# EAGLE board avoccado-nora-panel-teardropped (EAGLE 7.2.0), part 1 of 2
Avoccado-avr-yolandi Yolandi is the minified version of Avoccado-avr with less pins broken out and a footprint of less than one square inch for the PCB without peripherals.
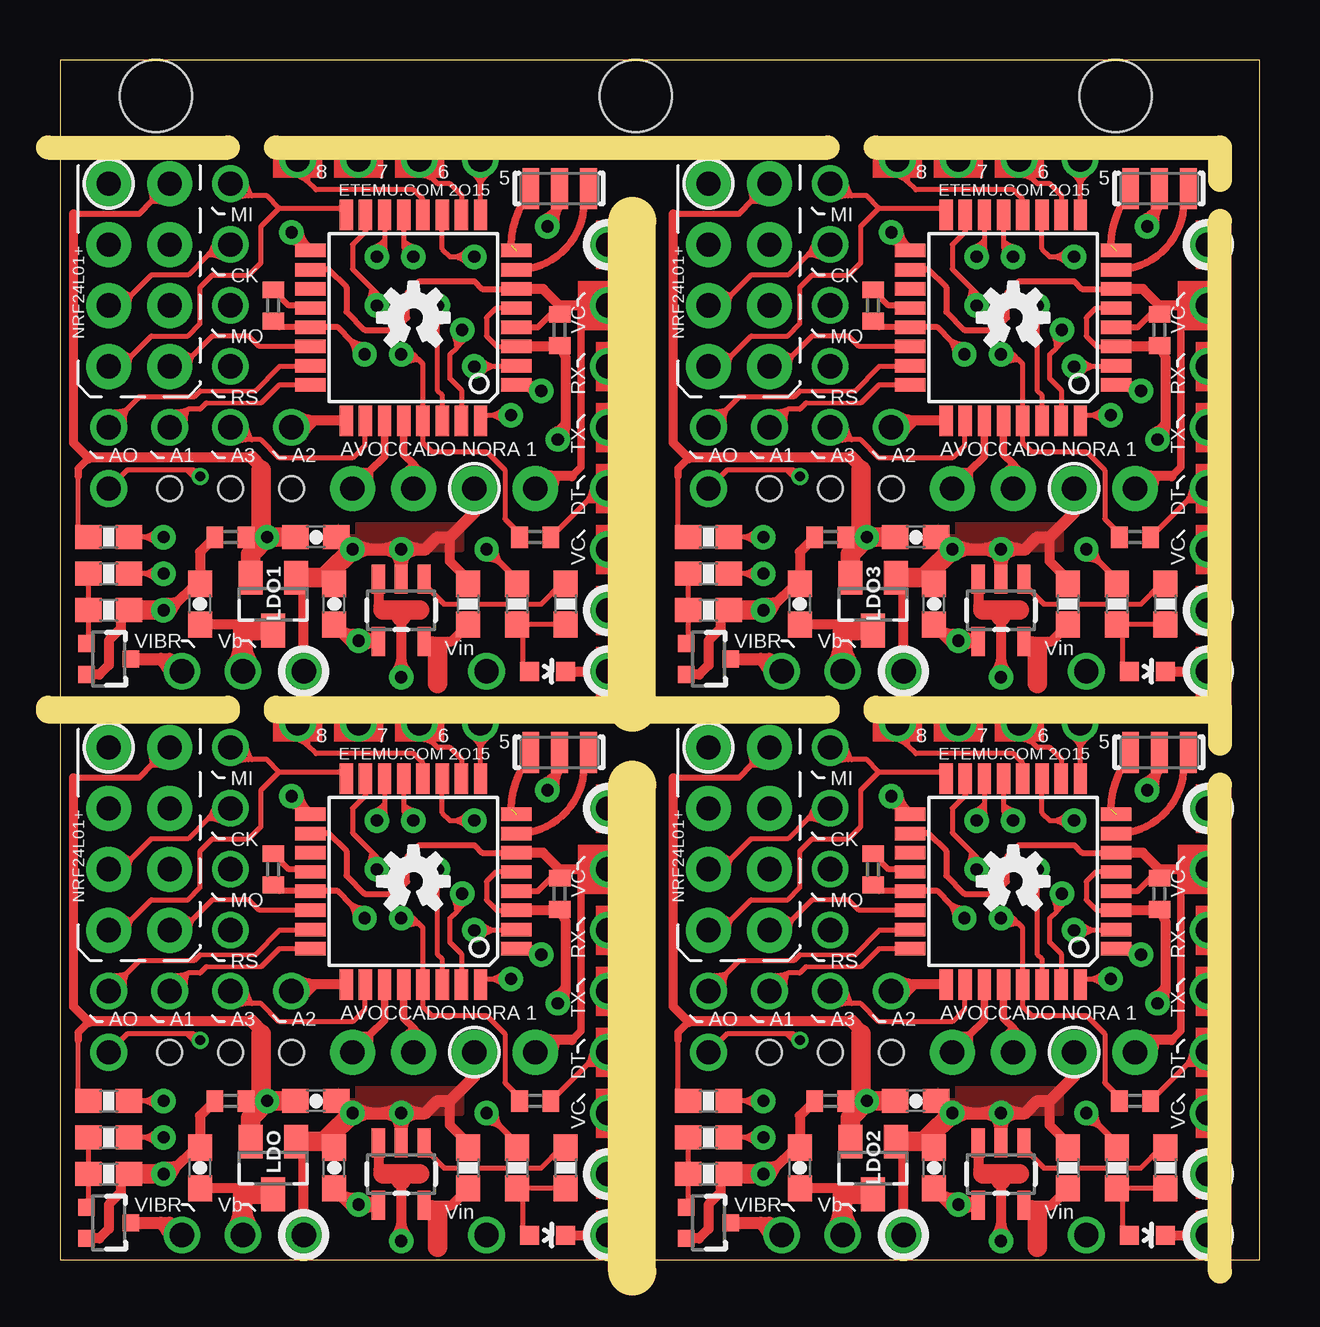
[diagram p0: board, top side]
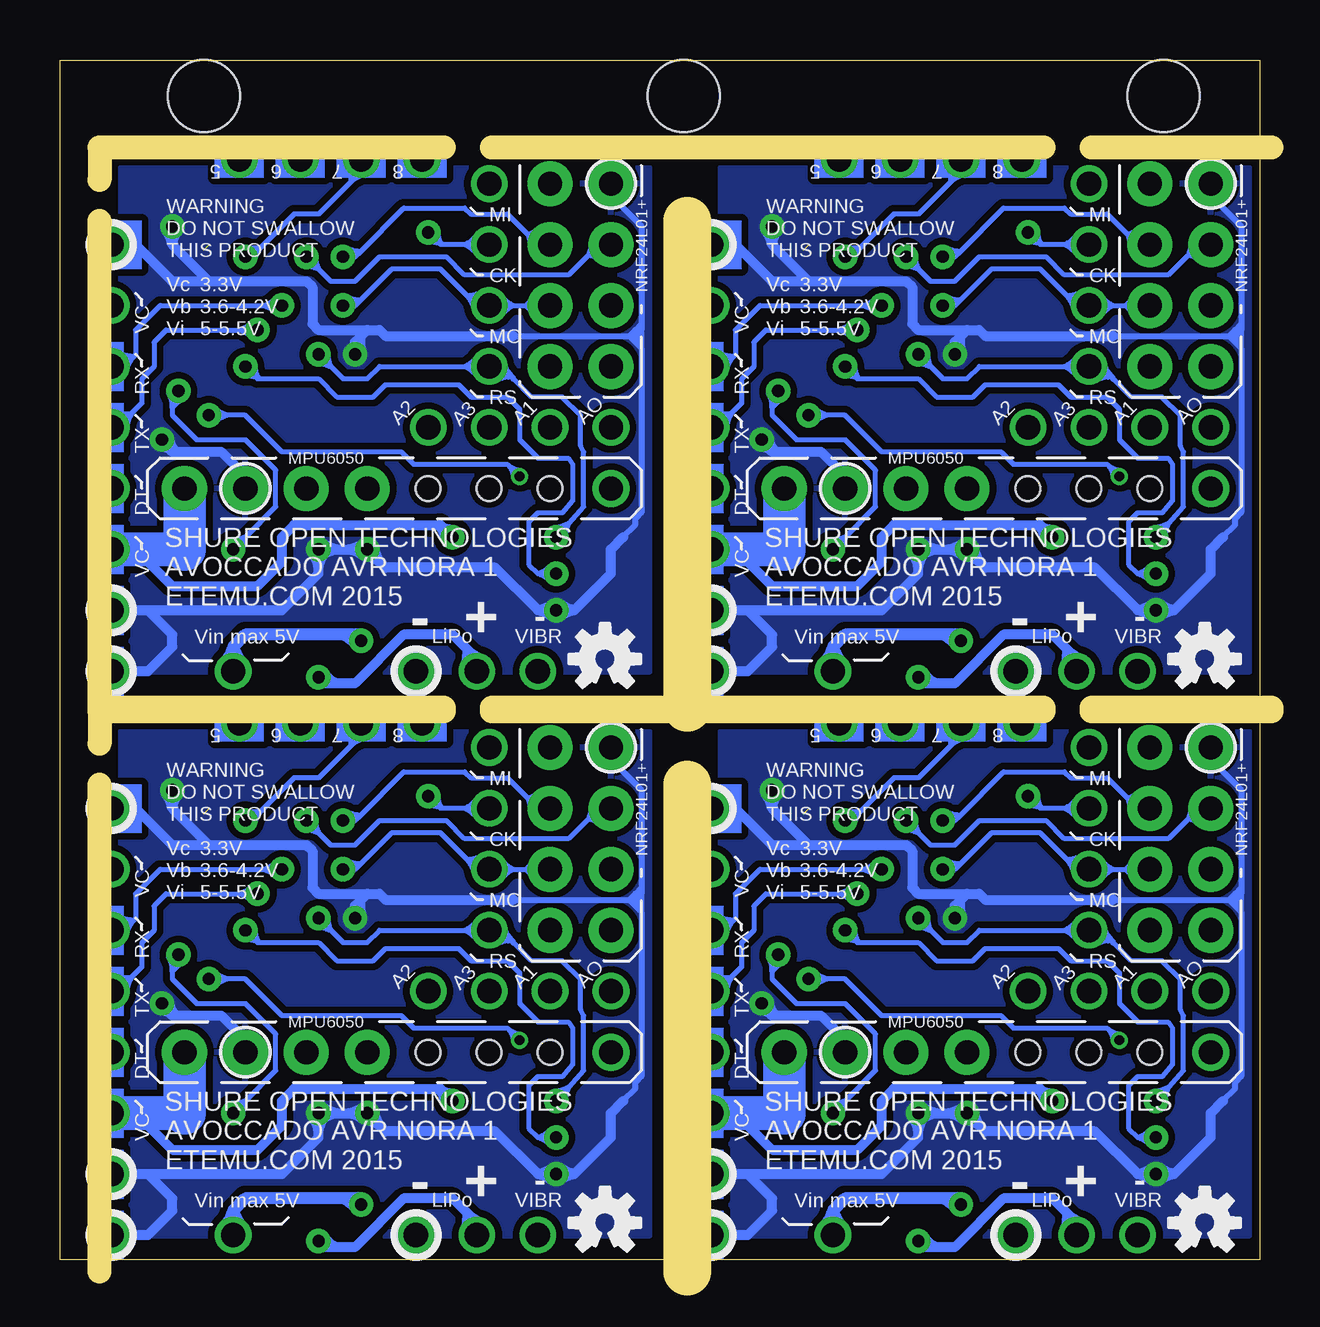
[diagram p1: board, bottom side, seen from below]

Size 50 x 50 mm. Coordinates in mm from the lower left corner, seen from the top.
Outline: 0,0 50,0 50,50 0,50 0,0
Copper layers (1*16): Top 0.035mm / dielectric 1.5mm / Bottom 0.035mm
Design rules "dirt_cheap_dirty_boards.v1 *": minimum track width 5mil, minimum drill 12mil, track to track 5mil, track to pad 5mil, pad to pad 5mil, via to via 5mil, smd to smd 0mil, copper to edge 10mil, drill to drill 10mil, minimum pad ring 10mil, minimum via ring 6mil, stop-mask expansion 0mil, vias tented up to drill 25mil, thermal gap 10mil
Net classes: 1 vcc: width 0.254 mm; 3 usbvcc: width 0.203 mm, drill 0.61 mm, clearance 0.152 mm
Holes 1.02 mm at 4.57,8.64 7.11,8.64 9.65,8.64 4.57,32.14 7.11,32.14 9.65,32.14 29.57,8.64 32.11,8.64 34.65,8.64 29.57,32.14 32.11,32.14 34.65,32.14
Holes 3 mm at 4,48.5 24,48.5 44,48.5
Milling: 16 lines

## Footprints (pad centres in the part's own frame; a part is rotated, then mirrored left to right if it is on the bottom)
TQFP32-08 = smd 1.27 x 0.559: 1 -4.293,2.8; 2 -4.293,2; 3 -4.293,1.2; 4 -4.293,0.4; 5 -4.293,-0.4; 6 -4.293,-1.2; 7 -4.293,-2; 8 -4.293,-2.8; 17 4.293,-2.8; 18 4.293,-2; 19 4.293,-1.2; 20 4.293,-0.4; 21 4.293,0.4; 22 4.293,1.2; 23 4.293,2; 24 4.293,2.8 | smd 0.559 x 1.27: 9 -2.8,-4.293; 10 -2,-4.293; 11 -1.2,-4.293; 12 -0.4,-4.293; 13 0.4,-4.293; 14 1.2,-4.293; 15 2,-4.293; 16 2.8,-4.293; 25 2.8,4.293; 26 2,4.293; 27 1.2,4.293; 28 0.4,4.293; 29 -0.4,4.293; 30 -1.2,4.293; 31 -2,4.293; 32 -2.8,4.293
C0402 = smd 0.7 x 0.9: 1 -0.65,0; 2 0.65,0
0603-CAP = smd 1.1 x 1: 1 -0.85,0; 2 0.85,0
LED-0603 = smd 0.8 x 0.8: A 0,-0.75; C 0,0.75
1X01NS-KIT = drill 1.016 pad 1.524: 1 0,0
1X02_NO_SILK = drill 1.016 pad 1.88: 1 0,0; 2 2.54,0
SOT23 = smd 1 x 1.4: 1 -0.95,-1.1; 2 0.95,-1.1; 3 0,1.1
RESONATOR-SMD = smd 0.7 x 1.7: 1 -1.2,0; 2 0,0; 3 1.2,0
SOT323 = smd 0.7 x 0.7: 1 -0.65,-0.925; 2 0.65,-0.925; 3 0,0.925
0603-RES = smd 1.1 x 1: 1 -0.85,0; 2 0.85,0
SOT23-5 = smd 0.55 x 1.2: 1 -0.95,-1.3; 2 0,-1.3; 3 0.95,-1.3; 4 0.95,1.3; 5 -0.95,1.3

## Placement (x,y rotation side)
AVR  ATMEGA328P  [TQFP32-08]  14.73,15.76 180 top
AVR1  ATMEGA328P  [TQFP32-08]  14.73,39.26 180 top
AVR2  ATMEGA328P  [TQFP32-08]  39.73,15.76 180 top
AVR3  ATMEGA328P  [TQFP32-08]  39.73,39.26 180 top
C1  0.1uF  [C0402]  8.89,16.26 90 top
C2  0.1uF  [C0402]  19.81,6.61 0 top
C3  0.1uF  [C0402]  20.83,15.25 90 top
C4  4.7uF  [0603-CAP]  11.43,3.82 90 top
C5  4.7uF  [0603-CAP]  5.84,3.82 90 top
C6  4.7uF  [0603-CAP]  10.67,6.61 0 top
C7  0.1uF  [C0402]  7.11,30.11 180 top
C8  0.1uF  [C0402]  20.83,38.75 90 top
C9  0.1uF  [C0402]  8.89,39.76 90 top
C10  0.1uF  [C0402]  7.11,6.61 180 top
C11  4.7uF  [0603-CAP]  11.43,27.32 90 top
C12  0.1uF  [C0402]  19.81,30.11 0 top
C13  4.7uF  [0603-CAP]  5.84,27.32 90 top
C14  4.7uF  [0603-CAP]  10.67,30.11 0 top
C15  0.1uF  [C0402]  32.11,6.61 180 top
C16  0.1uF  [C0402]  45.83,15.25 90 top
C17  0.1uF  [C0402]  33.89,16.26 90 top
C18  4.7uF  [0603-CAP]  36.43,3.82 90 top
C19  0.1uF  [C0402]  44.81,6.61 0 top
C20  4.7uF  [0603-CAP]  30.84,3.82 90 top
C21  4.7uF  [0603-CAP]  35.67,6.61 0 top
C22  0.1uF  [C0402]  32.11,30.11 180 top
C23  0.1uF  [C0402]  45.83,38.75 90 top
C24  0.1uF  [C0402]  33.89,39.76 90 top
C25  4.7uF  [0603-CAP]  36.43,27.32 90 top
C26  0.1uF  [C0402]  44.81,30.11 0 top
C27  4.7uF  [0603-CAP]  30.84,27.32 90 top
C28  4.7uF  [0603-CAP]  35.67,30.11 0 top
D1  LED  [LED-0603]  20.33,1.02 270 top
D2  LED  [LED-0603]  20.33,24.52 270 top
D3  LED  [LED-0603]  45.33,1.02 270 top
D4  LED  [LED-0603]  45.33,24.52 270 top
JP1  M01NOSILK-KIT  [1X01NS-KIT]  22.86,27.06 0 top
JP2  M021X02_NO_SILK  [1X02_NO_SILK]  2.03,21.34 0 top
JP3  M01NOSILK-KIT  [1X01NS-KIT]  22.86,18.8 0 top
JP4  M021X02_NO_SILK  [1X02_NO_SILK]  19.81,8.64 180 top
JP5  M021X02_NO_SILK  [1X02_NO_SILK]  14.73,8.64 180 top
JP6  M01NOSILK-KIT  [1X01NS-KIT]  22.86,3.56 0 top
JP7  M01NOSILK-KIT  [1X01NS-KIT]  22.86,37.22 0 top
JP8  M01NOSILK-KIT  [1X01NS-KIT]  22.86,13.72 0 top
JP9  M01NOSILK-KIT  [1X01NS-KIT]  22.86,11.18 0 top
JP10  M01NOSILK-KIT  [1X01NS-KIT]  22.86,8.64 0 top
JP11  M01NOSILK-KIT  [1X01NS-KIT]  22.86,16.26 0 top
JP12  M01NOSILK-KIT  [1X01NS-KIT]  7.11,21.34 0 top
JP13  M01NOSILK-KIT  [1X01NS-KIT]  7.11,18.8 0 top
JP14  M01NOSILK-KIT  [1X01NS-KIT]  7.11,16.26 0 top
JP15  M01NOSILK-KIT  [1X01NS-KIT]  7.11,13.72 0 top
JP16  M01NOSILK-KIT  [1X01NS-KIT]  22.86,34.68 0 top
JP17  M01NOSILK-KIT  [1X01NS-KIT]  17.78,1.02 0 top
JP18  M01NOSILK-KIT  [1X01NS-KIT]  22.86,6.1 0 top
JP19  M01NOSILK-KIT  [1X01NS-KIT]  2.03,11.18 90 top
JP20  M01NOSILK-KIT  [1X01NS-KIT]  4.57,11.18 90 top
JP21  M01NOSILK-KIT  [1X01NS-KIT]  9.65,11.18 90 top
JP22  M01NOSILK-KIT  [1X01NS-KIT]  7.11,11.18 90 top
JP23  M01NOSILK-KIT  [1X01NS-KIT]  5.08,1.02 0 top
JP24  M01NOSILK-KIT  [1X01NS-KIT]  7.62,1.02 0 top
JP25  M01NOSILK-KIT  [1X01NS-KIT]  10.16,1.02 0 top
JP26  M01NOSILK-KIT  [1X01NS-KIT]  22.86,1.02 0 top
JP27  M021X02_NO_SILK  [1X02_NO_SILK]  2.03,18.8 0 top
JP28  M021X02_NO_SILK  [1X02_NO_SILK]  2.03,16.26 0 top
JP29  M021X02_NO_SILK  [1X02_NO_SILK]  2.03,13.72 0 top
JP30  M01NOSILK-KIT  [1X01NS-KIT]  22.86,32.14 0 top
JP31  M01NOSILK-KIT  [1X01NS-KIT]  22.86,39.76 0 top
JP32  M01NOSILK-KIT  [1X01NS-KIT]  7.11,44.84 0 top
JP33  M01NOSILK-KIT  [1X01NS-KIT]  7.11,42.3 0 top
JP34  M01NOSILK-KIT  [1X01NS-KIT]  7.11,39.76 0 top
JP35  M01NOSILK-KIT  [1X01NS-KIT]  7.11,37.22 0 top
JP36  M01NOSILK-KIT  [1X01NS-KIT]  22.86,42.3 0 top
JP37  M01NOSILK-KIT  [1X01NS-KIT]  17.78,24.52 0 top
JP38  M01NOSILK-KIT  [1X01NS-KIT]  22.86,29.6 0 top
JP39  M01NOSILK-KIT  [1X01NS-KIT]  2.03,34.68 90 top
JP40  M01NOSILK-KIT  [1X01NS-KIT]  4.57,34.68 90 top
JP41  M01NOSILK-KIT  [1X01NS-KIT]  9.65,34.68 90 top
JP42  M01NOSILK-KIT  [1X01NS-KIT]  7.11,34.68 90 top
JP43  M01NOSILK-KIT  [1X01NS-KIT]  7.62,24.52 0 top
JP44  M01NOSILK-KIT  [1X01NS-KIT]  5.08,24.52 0 top
JP45  M01NOSILK-KIT  [1X01NS-KIT]  10.16,24.52 0 top
JP46  M01NOSILK-KIT  [1X01NS-KIT]  22.86,24.52 0 top
JP47  M021X02_NO_SILK  [1X02_NO_SILK]  2.03,44.84 0 top
JP48  M021X02_NO_SILK  [1X02_NO_SILK]  2.03,42.3 0 top
JP49  M021X02_NO_SILK  [1X02_NO_SILK]  2.03,39.76 0 top
JP50  M021X02_NO_SILK  [1X02_NO_SILK]  2.03,37.22 0 top
JP51  M021X02_NO_SILK  [1X02_NO_SILK]  19.81,32.14 180 top
JP52  M021X02_NO_SILK  [1X02_NO_SILK]  14.73,32.14 180 top
JP53  M01NOSILK-KIT  [1X01NS-KIT]  47.86,3.56 0 top
JP54  M01NOSILK-KIT  [1X01NS-KIT]  47.86,13.72 0 top
JP55  M01NOSILK-KIT  [1X01NS-KIT]  47.86,11.18 0 top
JP56  M01NOSILK-KIT  [1X01NS-KIT]  47.86,8.64 0 top
JP57  M01NOSILK-KIT  [1X01NS-KIT]  47.86,16.26 0 top
JP58  M01NOSILK-KIT  [1X01NS-KIT]  32.11,21.34 0 top
JP59  M01NOSILK-KIT  [1X01NS-KIT]  32.11,18.8 0 top
JP60  M01NOSILK-KIT  [1X01NS-KIT]  32.11,16.26 0 top
JP61  M01NOSILK-KIT  [1X01NS-KIT]  32.11,13.72 0 top
JP62  M01NOSILK-KIT  [1X01NS-KIT]  47.86,18.8 0 top
JP63  M01NOSILK-KIT  [1X01NS-KIT]  42.78,1.02 0 top
JP64  M01NOSILK-KIT  [1X01NS-KIT]  47.86,6.1 0 top
JP65  M01NOSILK-KIT  [1X01NS-KIT]  27.03,11.18 90 top
JP66  M01NOSILK-KIT  [1X01NS-KIT]  29.57,11.18 90 top
JP67  M01NOSILK-KIT  [1X01NS-KIT]  34.65,11.18 90 top
JP68  M01NOSILK-KIT  [1X01NS-KIT]  32.11,11.18 90 top
JP69  M01NOSILK-KIT  [1X01NS-KIT]  32.62,1.02 0 top
JP70  M01NOSILK-KIT  [1X01NS-KIT]  30.08,1.02 0 top
JP71  M01NOSILK-KIT  [1X01NS-KIT]  35.16,1.02 0 top
JP72  M01NOSILK-KIT  [1X01NS-KIT]  47.86,1.02 0 top
JP73  M021X02_NO_SILK  [1X02_NO_SILK]  27.03,21.34 0 top
JP74  M021X02_NO_SILK  [1X02_NO_SILK]  27.03,18.8 0 top
JP75  M021X02_NO_SILK  [1X02_NO_SILK]  27.03,16.26 0 top
JP76  M021X02_NO_SILK  [1X02_NO_SILK]  27.03,13.72 0 top
JP77  M021X02_NO_SILK  [1X02_NO_SILK]  44.81,8.64 180 top
JP78  M021X02_NO_SILK  [1X02_NO_SILK]  39.73,8.64 180 top
JP79  M01NOSILK-KIT  [1X01NS-KIT]  47.86,27.06 0 top
JP80  M01NOSILK-KIT  [1X01NS-KIT]  47.86,37.22 0 top
JP81  M01NOSILK-KIT  [1X01NS-KIT]  47.86,34.68 0 top
JP82  M01NOSILK-KIT  [1X01NS-KIT]  47.86,32.14 0 top
JP83  M01NOSILK-KIT  [1X01NS-KIT]  47.86,39.76 0 top
JP84  M01NOSILK-KIT  [1X01NS-KIT]  32.11,44.84 0 top
JP85  M01NOSILK-KIT  [1X01NS-KIT]  32.11,42.3 0 top
JP86  M01NOSILK-KIT  [1X01NS-KIT]  32.11,39.76 0 top
JP87  M01NOSILK-KIT  [1X01NS-KIT]  32.11,37.22 0 top
JP88  M01NOSILK-KIT  [1X01NS-KIT]  47.86,42.3 0 top
JP89  M01NOSILK-KIT  [1X01NS-KIT]  42.78,24.52 0 top
JP90  M01NOSILK-KIT  [1X01NS-KIT]  47.86,29.6 0 top
JP91  M01NOSILK-KIT  [1X01NS-KIT]  27.03,34.68 90 top
JP92  M01NOSILK-KIT  [1X01NS-KIT]  29.57,34.68 90 top
JP93  M01NOSILK-KIT  [1X01NS-KIT]  34.65,34.68 90 top
JP94  M01NOSILK-KIT  [1X01NS-KIT]  32.11,34.68 90 top
JP95  M01NOSILK-KIT  [1X01NS-KIT]  32.62,24.52 0 top
JP96  M01NOSILK-KIT  [1X01NS-KIT]  30.08,24.52 0 top
JP97  M01NOSILK-KIT  [1X01NS-KIT]  35.16,24.52 0 top
JP98  M01NOSILK-KIT  [1X01NS-KIT]  47.86,24.52 0 top
JP99  M021X02_NO_SILK  [1X02_NO_SILK]  27.03,44.84 0 top
JP100  M021X02_NO_SILK  [1X02_NO_SILK]  27.03,42.3 0 top
JP101  M021X02_NO_SILK  [1X02_NO_SILK]  27.03,39.76 0 top
JP102  M021X02_NO_SILK  [1X02_NO_SILK]  27.03,37.22 0 top
JP103  M021X02_NO_SILK  [1X02_NO_SILK]  44.81,32.14 180 top
JP104  M021X02_NO_SILK  [1X02_NO_SILK]  39.73,32.14 180 top
LDO  MCP1703CB  [SOT23]  8.89,3.82 180 top
LDO1  MCP1703CB  [SOT23]  8.89,27.32 180 top
LDO2  MCP1703CB  [SOT23]  33.89,3.82 180 top
LDO3  MCP1703CB  [SOT23]  33.89,27.32 180 top
LOGO1  OSHW-LOGOS  [OSHW-LOGO-S]  2.29,1.53 0 bottom
LOGO2  OSHW-LOGOS  [OSHW-LOGO-S]  14.73,15.76 0 top
LOGO3  OSHW-LOGOS  [OSHW-LOGO-S]  2.29,25.03 0 bottom
LOGO4  OSHW-LOGOS  [OSHW-LOGO-S]  14.73,39.26 0 top
LOGO5  OSHW-LOGOS  [OSHW-LOGO-S]  27.29,1.53 0 bottom
LOGO6  OSHW-LOGOS  [OSHW-LOGO-S]  39.73,15.76 0 top
LOGO7  OSHW-LOGOS  [OSHW-LOGO-S]  27.29,25.03 0 bottom
LOGO8  OSHW-LOGOS  [OSHW-LOGO-S]  39.73,39.26 0 top
Q1  16MHz  [RESONATOR-SMD]  20.83,21.14 0 top
Q2  FET  [SOT323]  2.03,1.53 270 top
Q3  16MHz  [RESONATOR-SMD]  20.83,44.64 0 top
Q4  FET  [SOT323]  2.03,25.03 270 top
Q5  16MHz  [RESONATOR-SMD]  45.83,21.14 0 top
Q6  FET  [SOT323]  27.03,1.53 270 top
Q7  16MHz  [RESONATOR-SMD]  45.83,44.64 0 top
Q8  FET  [SOT323]  27.03,25.03 270 top
R1  1K  [0603-RES]  2.03,5.09 180 top
R2  10K  [0603-RES]  2.03,6.61 180 top
R3  Rchg  [0603-RES]  17.02,3.82 270 top
R4  1K  [0603-RES]  21.08,3.82 90 top
R5  1M  [0603-RES]  2.03,3.56 180 top
R6  1K  [0603-RES]  19.05,3.82 270 top
R7  10K  [0603-RES]  2.03,30.11 180 top
R8  1K  [0603-RES]  2.03,28.59 180 top
R9  Rchg  [0603-RES]  17.02,27.32 270 top
R10  1K  [0603-RES]  21.08,27.32 90 top
R11  1M  [0603-RES]  2.03,27.06 180 top
R12  1K  [0603-RES]  19.05,27.32 270 top
R13  10K  [0603-RES]  27.03,6.61 180 top
R14  1K  [0603-RES]  27.03,5.09 180 top
R15  Rchg  [0603-RES]  42.02,3.82 270 top
R16  1K  [0603-RES]  46.08,3.82 90 top
R17  1M  [0603-RES]  27.03,3.56 180 top
R18  1K  [0603-RES]  44.05,3.82 270 top
R19  10K  [0603-RES]  27.03,30.11 180 top
R20  1K  [0603-RES]  27.03,28.59 180 top
R21  Rchg  [0603-RES]  42.02,27.32 270 top
R22  1K  [0603-RES]  46.08,27.32 90 top
R23  1M  [0603-RES]  27.03,27.06 180 top
R24  1K  [0603-RES]  44.05,27.32 270 top
TP1  M01NOSILK-KIT  [1X01NS-KIT]  17.53,22.36 270 top
TP2  M01NOSILK-KIT  [1X01NS-KIT]  2.03,8.64 0 top
TP3  M01NOSILK-KIT  [1X01NS-KIT]  17.53,45.86 270 top
TP4  M01NOSILK-KIT  [1X01NS-KIT]  14.99,45.86 270 top
TP5  M01NOSILK-KIT  [1X01NS-KIT]  12.45,45.86 270 top
TP6  M01NOSILK-KIT  [1X01NS-KIT]  14.99,22.36 270 top
TP7  M01NOSILK-KIT  [1X01NS-KIT]  12.45,22.36 270 top
TP8  M01NOSILK-KIT  [1X01NS-KIT]  9.91,22.36 270 top
TP9  M01NOSILK-KIT  [1X01NS-KIT]  9.91,45.86 270 top
TP10  M01NOSILK-KIT  [1X01NS-KIT]  2.03,32.14 0 top
TP11  M01NOSILK-KIT  [1X01NS-KIT]  42.53,22.36 270 top
TP12  M01NOSILK-KIT  [1X01NS-KIT]  39.99,22.36 270 top
TP13  M01NOSILK-KIT  [1X01NS-KIT]  37.45,22.36 270 top
TP14  M01NOSILK-KIT  [1X01NS-KIT]  34.91,22.36 270 top
TP15  M01NOSILK-KIT  [1X01NS-KIT]  27.03,8.64 0 top
TP16  M01NOSILK-KIT  [1X01NS-KIT]  42.53,45.86 270 top
TP17  M01NOSILK-KIT  [1X01NS-KIT]  39.99,45.86 270 top
TP18  M01NOSILK-KIT  [1X01NS-KIT]  37.45,45.86 270 top
TP19  M01NOSILK-KIT  [1X01NS-KIT]  34.91,45.86 270 top
TP20  M01NOSILK-KIT  [1X01NS-KIT]  27.03,32.14 0 top
U1  MCP73831  [SOT23-5]  14.22,27.06 180 top
U2  MCP73831  [SOT23-5]  14.22,3.56 180 top
U3  MCP73831  [SOT23-5]  39.22,3.56 180 top
U4  MCP73831  [SOT23-5]  39.22,27.06 180 top

## Library data of the parts
AVR AVR1-AVR3 = SparkFun-DigitalIC; PROD_ID: IC-09069
C1-C3 C7-C10 C12 C15-C17 C19 C22-C24 C26 D1-D4 Q1 Q3 Q5 Q7 U1-U4 = SparkFun
C4-C6 C11 C13 C14 C18 C20 C21 C25 C27 C28 = SparkFun-Capacitors; PROD_ID: CAP-08280
JP1-JP104 TP1-TP20 = SparkFun-Connectors
LDO LDO1-LDO3 = linear
LOGO1-LOGO8 = SparkFun-Aesthetics
Q2 Q4 Q6 Q8 = SparkFun-DiscreteSemi; PROD_ID: TRANS-11151
R1-R24 = SparkFun-Resistors

## Nets
3.3V: AVR.4 AVR.6 AVR.18 C3.2 C6.1 C10.1 JP2.2 JP4.1 JP11.1 JP18.1 LDO.2 R2.2
3.3V1: AVR1.4 AVR1.6 AVR1.18 C7.1 C8.2 C14.1 JP31.1 JP38.1 JP47.2 JP51.1 LDO1.2 R7.2
3.3V2: AVR2.4 AVR2.6 AVR2.18 C15.1 C16.2 C21.1 JP57.1 JP64.1 JP73.2 JP77.1 LDO2.2 R13.2
3.3V3: AVR3.4 AVR3.6 AVR3.18 C22.1 C23.2 C28.1 JP83.1 JP90.1 JP99.2 JP103.1 LDO3.2 R19.2
5V: C4.1 JP17.1 U2.4
5V1: C11.1 JP37.1 U1.4
5V2: C18.1 JP63.1 U3.4
5V3: C25.1 JP89.1 U4.4
A0: AVR.23 JP19.1
A1: AVR.24 JP20.1
A2: AVR.25 JP21.1
A3: AVR.26 JP22.1
A4: AVR.27 JP5.2
A5: AVR.28 JP5.1
A6: AVR.19
A7: AVR1.28 JP52.1
A7-NRF-IRQ: AVR.22 JP29.2
A7-NRF-IRQ1: AVR1.22 JP50.2
A7-NRF-IRQ2: AVR2.22 JP76.2
A7-NRF-IRQ3: AVR3.22 JP102.2
A8: AVR1.27 JP52.2
A9: AVR1.26 JP42.1
A10: AVR1.25 JP41.1
A11: AVR1.24 JP40.1
A12: AVR1.23 JP39.1
A13: AVR1.19
A14: AVR2.28 JP78.1
A15: AVR2.27 JP78.2
A16: AVR2.26 JP68.1
A17: AVR2.25 JP67.1
A18: AVR2.24 JP66.1
A19: AVR2.23 JP65.1
A20: AVR2.19
A21: AVR3.28 JP104.1
A22: AVR3.27 JP104.2
A23: AVR3.26 JP94.1
A24: AVR3.25 JP93.1
A25: AVR3.24 JP92.1
A26: AVR3.23 JP91.1
A27: AVR3.19
AREF: AVR.20 C1.2
AREF1: AVR1.20 C9.2
AREF2: AVR2.20 C17.2
AREF3: AVR3.20 C24.2
CHG-PROG: R3.2 U2.5
CHG-PROG1: R9.2 U1.5
CHG-PROG2: R15.2 U3.5
CHG-PROG3: R21.2 U4.5
D1: AVR1.13 JP48.1
D2: AVR.32
D3: AVR.1 R6.1
D4: AVR.2 R1.1
D5: AVR.9 TP1.1
D6: AVR.10 TP6.1
D7: AVR.11 TP7.1
D8: AVR.12 TP8.1
D9: AVR.13 JP27.1
D10: AVR.14 JP27.2
D11: AVR1.12 TP9.1
D12: AVR1.32
D13: AVR1.1 R12.1
D14: AVR1.2 R8.1
D15: AVR1.9 TP3.1
D16: AVR1.10 TP4.1
D17: AVR1.11 TP5.1
D18: AVR1.14 JP48.2
D19: AVR2.13 JP74.1
D20: AVR2.12 TP14.1
D21: AVR2.32
D22: AVR2.1 R18.1
D23: AVR2.2 R14.1
D24: AVR2.9 TP11.1
D25: AVR2.10 TP12.1
D26: AVR2.11 TP13.1
D27: AVR2.14 JP74.2
D28: AVR3.13 JP100.1
D29: AVR3.12 TP19.1
D30: AVR3.32
D31: AVR3.1 R24.1
D32: AVR3.2 R20.1
D33: AVR3.9 TP16.1
D34: AVR3.10 TP17.1
D35: AVR3.11 TP18.1
D36: AVR3.14 JP100.2
DTR: C2.2 JP10.1
DTR1: C12.2 JP30.1
DTR2: C19.2 JP56.1
DTR3: C26.2 JP82.1
GND [vcc]: AVR.3 AVR.5 AVR.21 C1.1 C3.1 C4.2 C5.2 C6.2 C10.2 D1.C JP2.1 JP3.1 JP4.2 JP6.1 JP25.1 JP26.1 LDO.1 Q1.2 Q2.2 R3.1 R5.1 U2.2
GND1 [vcc]: AVR1.3 AVR1.5 AVR1.21 C7.2 C8.1 C9.1 C11.2 C13.2 C14.2 D2.C JP1.1 JP36.1 JP45.1 JP46.1 JP47.1 JP51.2 LDO1.1 Q3.2 Q4.2 R9.1 R11.1 U1.2
GND2 [vcc]: AVR2.3 AVR2.5 AVR2.21 C15.2 C16.1 C17.1 C18.2 C20.2 C21.2 D3.C JP53.1 JP62.1 JP71.1 JP72.1 JP73.1 JP77.2 LDO2.1 Q5.2 Q6.2 R15.1 R17.1 U3.2
GND3 [vcc]: AVR3.3 AVR3.5 AVR3.21 C22.2 C23.1 C24.1 C25.2 C27.2 C28.2 D4.C JP79.1 JP88.1 JP97.1 JP98.1 JP99.1 JP103.2 LDO3.1 Q7.2 Q8.2 R21.1 R23.1 U4.2
LED: D1.A R4.1 R6.2
LED1: D2.A R10.1 R12.2
LED2: D3.A R16.1 R18.2
LED3: D4.A R22.1 R24.2
MISO: AVR.16 JP12.1 JP29.1
MISO1: AVR1.16 JP32.1 JP50.1
MISO2: AVR2.16 JP58.1 JP76.1
MISO3: AVR3.16 JP84.1 JP102.1
MOSI: AVR.15 JP14.1 JP28.2
MOSI1: AVR1.15 JP34.1 JP49.2
MOSI2: AVR2.15 JP60.1 JP75.2
MOSI3: AVR3.15 JP86.1 JP101.2
N$1: AVR.8 Q1.1
N$2: AVR.7 Q1.3
N$3: AVR1.8 Q3.1
N$4: AVR1.7 Q3.3
N$5: Q4.1 R8.2 R11.2
N$6: Q2.1 R1.2 R5.2
N$7: AVR2.8 Q5.1
N$8: AVR2.7 Q5.3
N$9: Q6.1 R14.2 R17.2
N$10: AVR3.8 Q7.1
N$11: AVR3.7 Q7.3
N$12: Q8.1 R20.2 R23.2
RESET: AVR.29 C2.1 JP15.1 R2.1
RESET1: AVR1.29 C12.1 JP35.1 R7.1
RESET2: AVR2.29 C19.1 JP61.1 R13.1
RESET3: AVR3.29 C26.1 JP87.1 R19.1
RXI: AVR.30 JP8.1
RXI1: AVR1.30 JP7.1
RXI2: AVR2.30 JP54.1
RXI3: AVR3.30 JP80.1
SCK: AVR.17 JP13.1 JP28.1
SCK1: AVR1.17 JP33.1 JP49.1
SCK2: AVR2.17 JP59.1 JP75.1
SCK3: AVR3.17 JP85.1 JP101.1
SOC: R4.2 U2.1
SOC1: R10.2 U1.1
SOC2: R16.2 U3.1
SOC3: R22.2 U4.1
TXO: AVR.31 JP9.1
TXO1: AVR1.31 JP16.1
TXO2: AVR2.31 JP55.1
TXO3: AVR3.31 JP81.1
VBAT [vcc]: C5.1 JP24.1 LDO.3 U2.3
VBAT1 [vcc]: C13.1 JP43.1 LDO1.3 U1.3
VBAT2 [vcc]: C20.1 JP69.1 LDO2.3 U3.3
VBAT3 [vcc]: C27.1 JP95.1 LDO3.3 U4.3
VIBR: JP23.1 Q2.3
VIBR1: JP44.1 Q4.3
VIBR2: JP70.1 Q6.3
VIBR3: JP96.1 Q8.3

## Tracks (layer width: path | path; a pad name or v marks a point on that pad's centre or on a via)
3.3V  (via drill 0.51 pad 1.02)
  Top 0.203: AVR.18 10.47,17.79 | 0.76,9.15 0.76,7.03 R2.2 | C10.1 7.87,6.61 | 7.87,6.61 v8.64,6.61 | 7.87,6.61 arc-29 8.42,6.27 v8.64,6.61 | 7.87,6.61 arc29 8.42,6.96 v8.64,6.61
  Top 0.254: 10.47,17.79 11.18,17.79 11.94,17.03 11.94,16.01 12.7,15.25 13.97,15.25 14.48,15.76 14.48,16.77 14.99,17.28 17.27,17.28 17.6,16.96 AVR.6 | 20.83,16.26 C3.2 20.46,15.9 19.92,15.36 AVR.4 | 10.41,17.79 AVR.18 | JP2.2 3.85,20.63 | 3.85,20.63 3.3,20.07 0.56,20.07 | v8.64,6.61 8.38,6.87 | 3.85,20.63 arc-29 4.46,20.54 JP2.2 | 3.85,20.63 arc29 3.77,21.23 JP2.2
  Top 0.305: 8.38,9.41 8.38,9.53 | 21.34,9.15 21.72,9.53 21.72,16.14 21.84,16.26 | 0.76,9.15 0.76,9.47 1.2,9.91
  Top 0.381: 0.56,20.07 0.56,10.55 1.2,9.91
  Top 0.406: JP11.1 21.84,16.26 | 21.84,16.26 | 21.84,16.26 20.83,16.26 20.14,16.96 AVR.6 | C10.1 7.69,6.54 | 21.34,9.15 20.69,9.15 | 20.69,9.15 20.32,9.15 JP4.1 | 1.2,9.91 1.27,9.93 8.01,9.93 | 21.84,16.26 arc-29 22.55,15.8 JP11.1 | 21.84,16.26 arc29 22.55,16.73 JP11.1 | 20.69,9.15 arc-29 20.01,9.34 JP4.1 | 20.69,9.15 arc29 20.53,8.47 JP4.1
  Top 0.559: 8.38,9.53 8.01,9.93
  Top 0.813: 8.38,6.87 8.38,9.41 | LDO.2 7.94,5.92 v8.64,6.61 C6.1
  Bottom 0.406: 22.35,6.1 JP18.1 | 21.84,6.1 20.32,4.58 16.76,4.58 15.75,5.6 15.75,6.61 15.24,7.12 9.2,7.12 | 21.84,6.1 JP18.1 | 9.2,7.12 9.14,7.12 v8.64,6.61 | 9.2,7.12 arc-29 8.54,6.9 v8.64,6.61 | 9.2,7.12 arc29 8.91,6.49 v8.64,6.61 | 21.84,6.1 arc-29 22.55,5.64 JP18.1 | 21.84,6.1 arc29 22.55,6.57 JP18.1
  Bottom 1.422: 19.81,6.1 19.82,6.1 21.84,6.1 JP18.1
  Bottom 1.778: JP4.1 19.81,6.1
3.3V1  (via drill 0.51 pad 1.02)
  Top 0.203: AVR1.18 10.47,41.29 | 0.76,32.65 0.76,30.53 R7.2 | C7.1 7.87,30.11 | 7.87,30.11 v8.64,30.11 | 7.87,30.11 arc-29 8.42,29.77 v8.64,30.11 | 7.87,30.11 arc29 8.42,30.46 v8.64,30.11
  Top 0.254: 10.47,41.29 11.18,41.29 11.94,40.53 11.94,39.51 12.7,38.75 13.97,38.75 14.48,39.26 14.48,40.27 14.99,40.78 17.27,40.78 17.6,40.46 AVR1.6 | 20.83,39.76 C8.2 20.46,39.4 19.92,38.86 AVR1.4 | 10.41,41.29 AVR1.18 | JP47.2 3.85,44.13 | 3.85,44.13 3.3,43.57 0.56,43.57 | v8.64,30.11 8.38,30.37 | 3.85,44.13 arc-29 4.46,44.04 JP47.2 | 3.85,44.13 arc29 3.77,44.73 JP47.2
  Top 0.305: 8.38,32.91 8.38,33.03 | 21.34,32.65 21.72,33.03 21.72,39.64 21.84,39.76 | 0.76,32.65 0.76,32.97 1.2,33.41
  Top 0.381: 0.56,43.57 0.56,34.05 1.2,33.41
  Top 0.406: JP31.1 21.84,39.76 | 21.84,39.76 | 21.84,39.76 20.83,39.76 20.14,40.46 AVR1.6 | C7.1 7.69,30.04 | 21.34,32.65 20.69,32.65 | 20.69,32.65 20.32,32.65 JP51.1 | 1.2,33.41 1.27,33.43 8.01,33.43 | 21.84,39.76 arc-29 22.55,39.3 JP31.1 | 21.84,39.76 arc29 22.55,40.23 JP31.1 | 20.69,32.65 arc-29 20.01,32.84 JP51.1 | 20.69,32.65 arc29 20.53,31.97 JP51.1
  Top 0.559: 8.38,33.03 8.01,33.43
  Top 0.813: 8.38,30.37 8.38,32.91 | LDO1.2 7.94,29.42 v8.64,30.11 C14.1
  Bottom 0.406: 22.35,29.6 JP38.1 | 21.84,29.6 20.32,28.08 16.76,28.08 15.75,29.1 15.75,30.11 15.24,30.62 9.2,30.62 | 21.84,29.6 JP38.1 | 9.2,30.62 9.14,30.62 v8.64,30.11 | 9.2,30.62 arc-29 8.54,30.4 v8.64,30.11 | 9.2,30.62 arc29 8.91,29.98 v8.64,30.11 | 21.84,29.6 arc-29 22.55,29.14 JP38.1 | 21.84,29.6 arc29 22.55,30.07 JP38.1
  Bottom 1.422: 19.81,29.6 19.82,29.6 21.84,29.6 JP38.1
  Bottom 1.778: JP51.1 19.81,29.6
3.3V2  (via drill 0.51 pad 1.02)
  Top 0.203: AVR2.18 35.47,17.79 | 25.76,9.15 25.76,7.03 R13.2 | C15.1 32.87,6.61 | 32.87,6.61 v33.64,6.61 | 32.87,6.61 arc-29 33.42,6.27 v33.64,6.61 | 32.87,6.61 arc29 33.42,6.96 v33.64,6.61
  Top 0.254: 35.47,17.79 36.18,17.79 36.94,17.03 36.94,16.01 37.7,15.25 38.97,15.25 39.48,15.76 39.48,16.77 39.99,17.28 42.27,17.28 42.6,16.96 AVR2.6 | 45.83,16.26 C16.2 45.46,15.9 44.92,15.36 AVR2.4 | 35.41,17.79 AVR2.18 | JP73.2 28.85,20.63 | 28.85,20.63 28.3,20.07 25.56,20.07 | v33.64,6.61 33.38,6.87 | 28.85,20.63 arc-29 29.46,20.54 JP73.2 | 28.85,20.63 arc29 28.77,21.23 JP73.2
  Top 0.305: 33.38,9.41 33.38,9.53 | 46.34,9.15 46.72,9.53 46.72,16.14 46.84,16.26 | 25.76,9.15 25.76,9.47 26.2,9.91
  Top 0.381: 25.56,20.07 25.56,10.55 26.2,9.91
  Top 0.406: JP57.1 46.84,16.26 | 46.84,16.26 | 46.84,16.26 45.83,16.26 45.14,16.96 AVR2.6 | C15.1 32.69,6.54 | 46.34,9.15 45.69,9.15 | 45.69,9.15 45.32,9.15 JP77.1 | 26.2,9.91 26.27,9.93 33.01,9.93 | 46.84,16.26 arc-29 47.55,15.8 JP57.1 | 46.84,16.26 arc29 47.55,16.73 JP57.1 | 45.69,9.15 arc-29 45.01,9.34 JP77.1 | 45.69,9.15 arc29 45.53,8.47 JP77.1
  Top 0.559: 33.38,9.53 33.01,9.93
  Top 0.813: 33.38,6.87 33.38,9.41 | LDO2.2 32.94,5.92 v33.64,6.61 C21.1
  Bottom 0.406: 47.35,6.1 JP64.1 | 46.84,6.1 45.32,4.58 41.76,4.58 40.75,5.6 40.75,6.61 40.24,7.12 34.2,7.12 | 46.84,6.1 JP64.1 | 34.2,7.12 34.14,7.12 v33.64,6.61 | 34.2,7.12 arc-29 33.54,6.9 v33.64,6.61 | 34.2,7.12 arc29 33.91,6.49 v33.64,6.61 | 46.84,6.1 arc-29 47.55,5.64 JP64.1 | 46.84,6.1 arc29 47.55,6.57 JP64.1
  Bottom 1.422: 44.81,6.1 44.82,6.1 46.84,6.1 JP64.1
  Bottom 1.778: JP77.1 44.81,6.1
3.3V3  (via drill 0.51 pad 1.02)
  Top 0.203: AVR3.18 35.47,41.29 | 25.76,32.65 25.76,30.53 R19.2 | C22.1 32.87,30.11 | 32.87,30.11 v33.64,30.11 | 32.87,30.11 arc-29 33.42,29.77 v33.64,30.11 | 32.87,30.11 arc29 33.42,30.46 v33.64,30.11
  Top 0.254: 35.47,41.29 36.18,41.29 36.94,40.53 36.94,39.51 37.7,38.75 38.97,38.75 39.48,39.26 39.48,40.27 39.99,40.78 42.27,40.78 42.6,40.46 AVR3.6 | 45.83,39.76 C23.2 45.46,39.4 44.92,38.86 AVR3.4 | 35.41,41.29 AVR3.18 | JP99.2 28.85,44.13 | 28.85,44.13 28.3,43.57 25.56,43.57 | v33.64,30.11 33.38,30.37 | 28.85,44.13 arc-29 29.46,44.04 JP99.2 | 28.85,44.13 arc29 28.77,44.73 JP99.2
  Top 0.305: 33.38,32.91 33.38,33.03 | 46.34,32.65 46.72,33.03 46.72,39.64 46.84,39.76 | 25.76,32.65 25.76,32.97 26.2,33.41
  Top 0.381: 25.56,43.57 25.56,34.05 26.2,33.41
  Top 0.406: JP83.1 46.84,39.76 | 46.84,39.76 | 46.84,39.76 45.83,39.76 45.14,40.46 AVR3.6 | C22.1 32.69,30.04 | 46.34,32.65 45.69,32.65 | 45.69,32.65 45.32,32.65 JP103.1 | 26.2,33.41 26.27,33.43 33.01,33.43 | 46.84,39.76 arc-29 47.55,39.3 JP83.1 | 46.84,39.76 arc29 47.55,40.23 JP83.1 | 45.69,32.65 arc-29 45.01,32.84 JP103.1 | 45.69,32.65 arc29 45.53,31.97 JP103.1
  Top 0.559: 33.38,33.03 33.01,33.43
  Top 0.813: 33.38,30.37 33.38,32.91 | LDO3.2 32.94,29.42 v33.64,30.11 C28.1
  Bottom 0.406: 47.35,29.6 JP90.1 | 46.84,29.6 45.32,28.08 41.76,28.08 40.75,29.1 40.75,30.11 40.24,30.62 34.2,30.62 | 46.84,29.6 JP90.1 | 34.2,30.62 34.14,30.62 v33.64,30.11 | 34.2,30.62 arc-29 33.54,30.4 v33.64,30.11 | 34.2,30.62 arc29 33.91,29.98 v33.64,30.11 | 46.84,29.6 arc-29 47.55,29.14 JP90.1 | 46.84,29.6 arc29 47.55,30.07 JP90.1
  Bottom 1.422: 44.81,29.6 44.82,29.6 46.84,29.6 JP90.1
  Bottom 1.778: JP103.1 44.81,29.6
5V  (via drill 0.51 pad 1.02)
  Top 0.508: U2.4 13.24,2.29 13.21,2.29 | 13.21,2.29 v12.45,2.29 | v12.45,2.29 12.1,2.29 11.76,2.63 | 11.76,2.63 C4.1 | 13.21,2.29 arc-29 12.53,2.53 v12.45,2.29 | 13.21,2.29 arc29 12.53,2.06 v12.45,2.29 | 11.76,2.63 arc-29 12.26,2.12 v12.45,2.29 | 11.76,2.63 arc29 12.48,2.55 v12.45,2.29
  Bottom 0.508: 12.45,2.55 13.16,2.55 | 13.16,2.55 17.27,2.55 17.78,2.04 | JP17.1 17.78,2.04 | 13.16,2.55 arc-29 12.45,2.55 | 12.45,2.55 v12.45,2.29 12.61,2.1 arc-29 13.16,2.55 | 17.78,2.04 arc-29 17.34,1.28 JP17.1 | 17.78,2.04 arc29 18.22,1.28 JP17.1
5V1  (via drill 0.51 pad 1.02)
  Top 0.508: U1.4 13.24,25.79 13.21,25.79 | 13.21,25.79 v12.45,25.79 | v12.45,25.79 12.1,25.79 11.76,26.13 | 11.76,26.13 C11.1 | 13.21,25.79 arc-29 12.53,26.03 v12.45,25.79 | 13.21,25.79 arc29 12.53,25.55 v12.45,25.79 | 11.76,26.13 arc-29 12.26,25.62 v12.45,25.79 | 11.76,26.13 arc29 12.48,26.05 v12.45,25.79
  Bottom 0.508: 12.45,26.05 13.16,26.05 | 13.16,26.05 17.27,26.05 17.78,25.54 | JP37.1 17.78,25.54 | 13.16,26.05 arc-29 12.45,26.05 | 12.45,26.05 v12.45,25.79 12.61,25.6 arc-29 13.16,26.05 | 17.78,25.54 arc-29 17.34,24.78 JP37.1 | 17.78,25.54 arc29 18.22,24.78 JP37.1
5V2  (via drill 0.51 pad 1.02)
  Top 0.508: U3.4 38.24,2.29 38.21,2.29 | 38.21,2.29 v37.45,2.29 | v37.45,2.29 37.1,2.29 36.76,2.63 | 36.76,2.63 C18.1 | 38.21,2.29 arc-29 37.53,2.53 v37.45,2.29 | 38.21,2.29 arc29 37.53,2.06 v37.45,2.29 | 36.76,2.63 arc-29 37.26,2.12 v37.45,2.29 | 36.76,2.63 arc29 37.48,2.55 v37.45,2.29
  Bottom 0.508: 37.45,2.55 38.16,2.55 | 38.16,2.55 42.27,2.55 42.78,2.04 | JP63.1 42.78,2.04 | 38.16,2.55 arc-29 37.45,2.55 | 37.45,2.55 v37.45,2.29 37.61,2.1 arc-29 38.16,2.55 | 42.78,2.04 arc-29 42.34,1.28 JP63.1 | 42.78,2.04 arc29 43.22,1.28 JP63.1
5V3  (via drill 0.51 pad 1.02)
  Top 0.508: U4.4 38.24,25.79 38.21,25.79 | 38.21,25.79 v37.45,25.79 | v37.45,25.79 37.1,25.79 36.76,26.13 | 36.76,26.13 C25.1 | 38.21,25.79 arc-29 37.53,26.03 v37.45,25.79 | 38.21,25.79 arc29 37.53,25.55 v37.45,25.79 | 36.76,26.13 arc-29 37.26,25.62 v37.45,25.79 | 36.76,26.13 arc29 37.48,26.05 v37.45,25.79
  Bottom 0.508: 37.45,26.05 38.16,26.05 | 38.16,26.05 42.27,26.05 42.78,25.54 | JP89.1 42.78,25.54 | 38.16,26.05 arc-29 37.45,26.05 | 37.45,26.05 v37.45,25.79 37.61,25.6 arc-29 38.16,26.05 | 42.78,25.54 arc-29 42.34,24.78 JP89.1 | 42.78,25.54 arc29 43.22,24.78 JP89.1
A0
  Top 0.178: 8.13,12.71 5.84,12.71
  Top 0.203: AVR.23 10.41,13.72 9.14,13.72 8.13,12.71 | 5.84,12.71 5.59,12.45 3.3,12.45 2.75,11.9 | 2.75,11.9 JP19.1 | 2.75,11.9 arc-29 1.98,11.84 JP19.1 | 2.75,11.9 arc29 2.69,11.13 JP19.1
A1
  Top 0.178: 8.38,12.2 6.1,12.2
  Top 0.203: AVR.24 9.14,12.96 8.38,12.2 | 6.1,12.2 5.84,11.95 5.33,11.95 5.29,11.9 | 5.29,11.9 JP20.1 | 5.29,11.9 arc-29 4.52,11.84 JP20.1 | 5.29,11.9 arc29 5.23,11.13 JP20.1
A2
  Top 0.406: AVR.25 10.63,11.46 | 10.63,11.46 9.93,11.46 JP21.1 | 10.63,11.46 arc-29 9.82,11.72 JP21.1 | 10.63,11.46 arc29 10.08,10.82 JP21.1
A3
  Top 0.203: AVR.26 12.7,11.43 12.7,10.42 12.19,9.91 9.14,9.91 8.38,10.68 7.99,10.68 | 7.99,10.68 7.62,10.68 JP22.1 | 7.99,10.68 arc-29 7.74,11.4 JP22.1 | 7.99,10.68 arc29 7.23,10.54 JP22.1
A4
  Top 0.305: AVR.27 13.53,9.98 12.91,9.35 | 12.91,9.35 JP5.2 | 12.91,9.35 arc-29 12.27,9.42 JP5.2 | 12.91,9.35 arc29 12.97,8.72 JP5.2
A5
  Top 0.305: AVR.28 14.33,10.05 14.73,9.65 | 14.73,9.65 JP5.1 | 14.73,9.65 arc-29 14.23,9.25 JP5.1 | 14.73,9.65 arc29 15.23,9.25 JP5.1
A7
  Top 0.305: AVR1.28 14.33,33.55 14.73,33.15 | 14.73,33.15 JP52.1 | 14.73,33.15 arc-29 14.23,32.75 JP52.1 | 14.73,33.15 arc29 15.23,32.75 JP52.1
A7-NRF-IRQ
  Top 0.203: AVR.22 8.31,14.56 7.87,14.99 6.35,14.99 5.5,14.14 | 5.5,14.14 5.08,13.72 JP29.2 | 5.5,14.14 arc-29 5.01,14.44 JP29.2 | 5.5,14.14 arc29 5.4,13.58 JP29.2
A7-NRF-IRQ1
  Top 0.203: AVR1.22 8.31,38.06 7.87,38.49 6.35,38.49 5.5,37.64 | 5.5,37.64 5.08,37.22 JP50.2 | 5.5,37.64 arc-29 5.01,37.94 JP50.2 | 5.5,37.64 arc29 5.4,37.08 JP50.2
A7-NRF-IRQ2
  Top 0.203: AVR2.22 33.31,14.56 32.87,14.99 31.35,14.99 30.5,14.14 | 30.5,14.14 30.08,13.72 JP76.2 | 30.5,14.14 arc-29 30.01,14.44 JP76.2 | 30.5,14.14 arc29 30.4,13.58 JP76.2
A7-NRF-IRQ3
  Top 0.203: AVR3.22 33.31,38.06 32.87,38.49 31.35,38.49 30.5,37.64 | 30.5,37.64 30.08,37.22 JP102.2 | 30.5,37.64 arc-29 30.01,37.94 JP102.2 | 30.5,37.64 arc29 30.4,37.08 JP102.2
A8
  Top 0.305: AVR1.27 13.53,33.48 12.91,32.85 | 12.91,32.85 JP52.2 | 12.91,32.85 arc-29 12.27,32.92 JP52.2 | 12.91,32.85 arc29 12.97,32.22 JP52.2
A9
  Top 0.203: AVR1.26 12.7,34.93 12.7,33.92 12.19,33.41 9.14,33.41 8.38,34.18 7.99,34.18 | 7.99,34.18 7.62,34.18 JP42.1 | 7.99,34.18 arc-29 7.74,34.9 JP42.1 | 7.99,34.18 arc29 7.23,34.03 JP42.1
A10
  Top 0.406: AVR1.25 10.63,34.96 | 10.63,34.96 9.93,34.96 JP41.1 | 10.63,34.96 arc-29 9.82,35.22 JP41.1 | 10.63,34.96 arc29 10.08,34.32 JP41.1
A11
  Top 0.178: 8.38,35.7 6.1,35.7
  Top 0.203: AVR1.24 9.14,36.46 8.38,35.7 | 6.1,35.7 5.84,35.45 5.33,35.45 5.29,35.4 | 5.29,35.4 JP40.1 | 5.29,35.4 arc-29 4.52,35.34 JP40.1 | 5.29,35.4 arc29 5.23,34.63 JP40.1
A12
  Top 0.178: 8.13,36.21 5.84,36.21
  Top 0.203: AVR1.23 10.41,37.22 9.14,37.22 8.13,36.21 | 5.84,36.21 5.59,35.95 3.3,35.95 2.75,35.4 | 2.75,35.4 JP39.1 | 2.75,35.4 arc-29 1.98,35.34 JP39.1 | 2.75,35.4 arc29 2.69,34.63 JP39.1
A14
  Top 0.305: AVR2.28 39.33,10.05 39.73,9.65 | 39.73,9.65 JP78.1 | 39.73,9.65 arc-29 39.23,9.25 JP78.1 | 39.73,9.65 arc29 40.23,9.25 JP78.1
A15
  Top 0.305: AVR2.27 38.53,9.98 37.91,9.35 | 37.91,9.35 JP78.2 | 37.91,9.35 arc-29 37.27,9.42 JP78.2 | 37.91,9.35 arc29 37.98,8.72 JP78.2
A16
  Top 0.203: AVR2.26 37.7,11.43 37.7,10.42 37.19,9.91 34.14,9.91 33.38,10.68 32.99,10.68 | 32.99,10.68 32.62,10.68 JP68.1 | 32.99,10.68 arc-29 32.73,11.4 JP68.1 | 32.99,10.68 arc29 32.23,10.54 JP68.1
A17
  Top 0.406: AVR2.25 35.63,11.46 | 35.63,11.46 34.93,11.46 JP67.1 | 35.63,11.46 arc-29 34.82,11.72 JP67.1 | 35.63,11.46 arc29 35.08,10.82 JP67.1
A18
  Top 0.178: 33.38,12.2 31.1,12.2
  Top 0.203: AVR2.24 34.14,12.96 33.38,12.2 | 31.1,12.2 30.84,11.95 30.33,11.95 30.29,11.9 | 30.29,11.9 JP66.1 | 30.29,11.9 arc-29 29.52,11.84 JP66.1 | 30.29,11.9 arc29 30.23,11.13 JP66.1
A19
  Top 0.178: 33.13,12.71 30.84,12.71
  Top 0.203: AVR2.23 35.41,13.72 34.14,13.72 33.13,12.71 | 30.84,12.71 30.59,12.45 28.3,12.45 27.75,11.9 | 27.75,11.9 JP65.1 | 27.75,11.9 arc-29 26.98,11.84 JP65.1 | 27.75,11.9 arc29 27.69,11.13 JP65.1
A21
  Top 0.305: AVR3.28 39.33,33.55 39.73,33.15 | 39.73,33.15 JP104.1 | 39.73,33.15 arc-29 39.23,32.75 JP104.1 | 39.73,33.15 arc29 40.23,32.75 JP104.1
A22
  Top 0.305: AVR3.27 38.53,33.48 37.91,32.85 | 37.91,32.85 JP104.2 | 37.91,32.85 arc-29 37.27,32.92 JP104.2 | 37.91,32.85 arc29 37.98,32.22 JP104.2
A23
  Top 0.203: AVR3.26 37.7,34.93 37.7,33.92 37.19,33.41 34.14,33.41 33.38,34.18 32.99,34.18 | 32.99,34.18 32.62,34.18 JP94.1 | 32.99,34.18 arc-29 32.73,34.9 JP94.1 | 32.99,34.18 arc29 32.23,34.03 JP94.1
A24
  Top 0.406: AVR3.25 35.63,34.96 | 35.63,34.96 34.93,34.96 JP93.1 | 35.63,34.96 arc-29 34.82,35.22 JP93.1 | 35.63,34.96 arc29 35.08,34.32 JP93.1
A25
  Top 0.178: 33.38,35.7 31.1,35.7
  Top 0.203: AVR3.24 34.14,36.46 33.38,35.7 | 31.1,35.7 30.84,35.45 30.33,35.45 30.29,35.4 | 30.29,35.4 JP92.1 | 30.29,35.4 arc-29 29.52,35.34 JP92.1 | 30.29,35.4 arc29 30.23,34.63 JP92.1
A26
  Top 0.178: 33.13,36.21 30.84,36.21
  Top 0.203: AVR3.23 35.41,37.22 34.14,37.22 33.13,36.21 | 30.84,36.21 30.59,35.95 28.3,35.95 27.75,35.4 | 27.75,35.4 JP91.1 | 27.75,35.4 arc-29 26.98,35.34 JP91.1 | 27.75,35.4 arc29 27.69,34.63 JP91.1
AREF
  Top 0.203: 10.33,16.26 AVR.20 | 9,16.91 C1.2
  Top 0.254: 10.33,16.26 9.54,16.26 C1.2
AREF1
  Top 0.203: 10.33,39.76 AVR1.20 | 9,40.41 C9.2
  Top 0.254: 10.33,39.76 9.54,39.76 C9.2
AREF2
  Top 0.203: 35.33,16.26 AVR2.20 | 34,16.91 C17.2
  Top 0.254: 35.33,16.26 34.54,16.26 C17.2
AREF3
  Top 0.203: 35.33,39.76 AVR3.20 | 34,40.41 C24.2
  Top 0.254: 35.33,39.76 34.54,39.76 C24.2
CHG-PROG
  Top 0.406: R3.2 16.31,2.26 U2.5 15.52,2.26 15.75,2.04
  Top 0.813: 15.75,2.04 15.75,0.52
CHG-PROG1
  Top 0.406: R9.2 16.31,25.76 U1.5 15.52,25.76 15.75,25.54
  Top 0.813: 15.75,25.54 15.75,24.02
CHG-PROG2
  Top 0.406: R15.2 41.31,2.26 U3.5 40.52,2.26 40.75,2.04
  Top 0.813: 40.75,2.04 40.75,0.52
CHG-PROG3
  Top 0.406: R21.2 41.31,25.76 U4.5 40.52,25.76 40.75,25.54
  Top 0.813: 40.75,25.54 40.75,24.02
D1  (via drill 0.51 pad 1.02)
  Top 0.203: AVR1.13 14.33,42.45 | 14.33,42.45 14.33,42.2 v14.73,41.8 | 14.33,42.45 arc-29 14.33,41.8 v14.73,41.8 | 14.33,42.45 arc29 14.91,42.16 v14.73,41.8
  Bottom 0.203: JP48.1 2.54,42.3 2.96,41.89 | 2.96,41.89 3.81,41.03 8.13,41.03 8.89,41.8 11.68,41.8 12.7,40.78 13.72,40.78 14.19,41.26 | v14.73,41.8 14.19,41.26 | 14.19,41.26 arc-29 14.82,41.4 v14.73,41.8 | 14.19,41.26 arc29 14.34,41.89 v14.73,41.8 | 2.96,41.89 arc-29 2.86,42.45 JP48.1 | 2.96,41.89 arc29 2.47,41.59 JP48.1
D2  (via drill 0.41, 0.51 pad 1.02)
  Top 0.203: AVR.32 17.76,11.69 18.03,11.69 | 18.03,11.69 v18.8,11.69 | v5.84,9.14 5.59,9.4 5.29,9.4 | 5.29,9.4 2.79,9.4 2.03,8.64 | 18.03,11.69 arc-29 18.58,11.35 v18.8,11.69 | 18.03,11.69 arc29 18.58,12.04 v18.8,11.69 | 5.29,9.4 arc-29 5.65,8.98 v5.84,9.14 | 5.29,9.4 arc29 5.84,9.4 v5.84,9.14
  Bottom 0.203: 6.27,9.57 6.35,9.65 10.26,9.65 10.77,10.16 15.75,10.16 17.28,11.69 18.03,11.69 | 6.27,9.57 v5.84,9.14 | 18.03,11.69 v18.8,11.69 | 18.03,11.69 arc-29 18.58,11.35 v18.8,11.69 | 18.03,11.69 arc29 18.58,12.04 v18.8,11.69 | 6.27,9.57 arc-29 5.75,9.38 v5.84,9.14 | 6.27,9.57 arc29 6.08,9.06 v5.84,9.14
D3  (via drill 0.51 pad 1.02)
  Top 0.203: 18.54,12.96 AVR.1 19.34,12.96 | 19.34,12.96 19.56,12.96 | 19.34,12.96 arc-29 19.75,12.45 v20.07,12.71 19.97,13.1 arc-29 19.34,12.96
  Top 0.254: 18.32,5.57 19.05,4.83 R6.1 | 18.32,5.57 v17.78,6.1 | 18.32,5.57 arc-29 18.15,6.2 v17.78,6.1 | 18.32,5.57 arc29 17.68,5.74 v17.78,6.1
  Top 0.406: 19.56,12.96 19.81,12.71 v20.07,12.71
  Bottom 0.203: v17.78,6.1 17.24,6.64 | 17.24,6.64 16,7.88 16,9.41 17.27,10.68 19.3,10.68 20.32,11.69 20.32,11.99 | v20.07,12.71 20.32,12.45 20.32,11.99 | 20.32,11.99 arc-29 20.46,12.62 v20.07,12.71 | 20.32,11.99 arc29 19.81,12.39 v20.07,12.71 | 17.24,6.64 arc-29 17.38,6.01 v17.78,6.1 | 17.24,6.64 arc29 17.87,6.5 v17.78,6.1
D4  (via drill 0.51 pad 1.02)
  Top 0.203: AVR.2 18.99,13.72 18.03,13.72 | 18.03,13.72 v17.27,13.72 | v4.32,5.09 3.56,5.09 | 3.56,5.09 R1.1 | 18.03,13.72 arc-29 17.49,14.07 v17.27,13.72 | 18.03,13.72 arc29 17.49,13.38 v17.27,13.72 | 3.56,5.09 arc-29 4.1,4.74 v4.32,5.09 | 3.56,5.09 arc29 4.1,5.43 v4.32,5.09
  Bottom 0.203: 5.08,5.09 5.46,5.47 5.46,7.25 5.09,7.62 4.06,7.62 3.63,8.13 3.63,9.65 3.81,9.91 5.08,9.91 5.84,10.67 5.84,11.95 6.35,12.45 7.87,12.45 8.38,12.96 11.43,12.96 11.94,12.45 13.46,12.45 14.22,13.22 16.7,13.22 | 5.08,5.09 v4.32,5.09 | v17.27,13.72 16.76,13.22 16.7,13.22 | 16.7,13.22 arc-29 17.34,13.32 v17.27,13.72 | 16.7,13.22 arc29 16.88,13.84 v17.27,13.72 | 5.08,5.09 arc-29 4.54,5.43 v4.32,5.09 | 5.08,5.09 arc29 4.54,4.74 v4.32,5.09
D5
  Top 0.203: AVR.9 17.53,21.34 | 17.53,21.34 17.53,21.85 | 17.53,21.34 arc-29 18.03,21.93 TP1.1 17.03,21.93 arc-29 17.53,21.34
  Top 0.406: 17.53,21.85 TP1.1
D6
  Top 0.203: AVR.10 16.73,20.87 16.26,21.34 15.75,21.34 15.56,21.52 | 15.56,21.52 14.99,22.1 TP6.1 | 15.56,21.52 arc-29 15.64,22.29 TP6.1 | 15.56,21.52 arc29 14.81,21.72 TP6.1
D7  (via drill 0.51 pad 1.02)
  Top 0.203: AVR.11 15.93,18.62 16.26,18.3 16.51,18.3 | 16.51,18.3 v17.27,18.3 | 16.51,18.3 arc-29 17.05,17.95 v17.27,18.3 | 16.51,18.3 arc29 17.05,18.64 v17.27,18.3
  Bottom 0.203: 16.62,18.69 15.24,20.07 14.22,20.07 12.86,21.43 | 16.62,18.69 17.02,18.3 v17.27,18.3 | 12.86,21.43 12.45,21.85 TP7.1 | 16.62,18.69 arc-29 16.91,18.11 v17.27,18.3 | 16.62,18.69 arc29 17.27,18.7 v17.27,18.3 | 12.86,21.43 arc-29 13.08,22.18 TP7.1 | 12.86,21.43 arc29 12.16,21.76 TP7.1
D8
  Top 0.203: AVR.12 15.13,20.69 14.73,21.09 10.67,21.09 10.32,21.43 | 10.32,21.43 9.91,21.85 TP8.1 | 10.32,21.43 arc-29 10.54,22.18 TP8.1 | 10.32,21.43 arc29 9.62,21.76 TP8.1
D9  (via drill 0.51 pad 1.02)
  Top 0.203: AVR.13 14.33,18.95 | 14.33,18.95 14.33,18.7 v14.73,18.3 | 14.33,18.95 arc-29 14.33,18.3 v14.73,18.3 | 14.33,18.95 arc29 14.91,18.66 v14.73,18.3
  Bottom 0.203: JP27.1 2.54,18.8 2.96,18.39 | 2.96,18.39 3.81,17.53 8.13,17.53 8.89,18.3 11.68,18.3 12.7,17.28 13.72,17.28 14.19,17.76 | v14.73,18.3 14.19,17.76 | 14.19,17.76 arc-29 14.82,17.9 v14.73,18.3 | 14.19,17.76 arc29 14.34,18.39 v14.73,18.3 | 2.96,18.39 arc-29 2.86,18.95 JP27.1 | 2.96,18.39 arc29 2.47,18.09 JP27.1
D10  (via drill 0.51 pad 1.02)
  Top 0.203: AVR.14 13.53,18.99 | 13.53,18.99 13.53,18.62 v13.21,18.3 | 13.53,18.99 arc-29 12.99,18.64 v13.21,18.3 | 13.53,18.99 arc29 13.61,18.35 v13.21,18.3
  Bottom 0.203: v13.21,18.3 12.7,18.3 12.48,18.52 | 5.5,19.22 6.35,20.07 7.87,20.07 8.13,20.33 10.67,20.33 12.48,18.52 | 5.5,19.22 5.08,18.8 JP27.2 | 12.48,18.52 arc-29 12.9,18.03 v13.21,18.3 | 12.48,18.52 arc29 13.1,18.69 v13.21,18.3 | 5.5,19.22 arc-29 5.01,19.52 JP27.2 | 5.5,19.22 arc29 5.4,18.66 JP27.2
D11
  Top 0.203: AVR1.12 15.13,44.19 14.73,44.59 10.67,44.59 10.32,44.93 | 10.32,44.93 9.91,45.35 TP9.1 | 10.32,44.93 arc-29 10.54,45.67 TP9.1 | 10.32,44.93 arc29 9.62,45.26 TP9.1
D12  (via drill 0.41, 0.51 pad 1.02)
  Top 0.203: AVR1.32 17.76,35.19 18.03,35.19 | 18.03,35.19 v18.8,35.19 | v5.84,32.64 5.59,32.9 5.29,32.9 | 5.29,32.9 2.79,32.9 2.03,32.14 | 18.03,35.19 arc-29 18.58,34.85 v18.8,35.19 | 18.03,35.19 arc29 18.58,35.54 v18.8,35.19 | 5.29,32.9 arc-29 5.65,32.48 v5.84,32.64 | 5.29,32.9 arc29 5.84,32.9 v5.84,32.64
  Bottom 0.203: 6.27,33.08 6.35,33.15 10.26,33.15 10.77,33.66 15.75,33.66 17.28,35.19 18.03,35.19 | 6.27,33.08 v5.84,32.64 | 18.03,35.19 v18.8,35.19 | 18.03,35.19 arc-29 18.58,34.85 v18.8,35.19 | 18.03,35.19 arc29 18.58,35.54 v18.8,35.19 | 6.27,33.08 arc-29 5.75,32.88 v5.84,32.64 | 6.27,33.08 arc29 6.08,32.56 v5.84,32.64
D13  (via drill 0.51 pad 1.02)
  Top 0.203: 18.54,36.46 AVR1.1 19.34,36.46 | 19.34,36.46 19.56,36.46 | 19.34,36.46 arc-29 19.75,35.95 v20.07,36.21 19.97,36.6 arc-29 19.34,36.46
  Top 0.254: 18.32,29.07 19.05,28.33 R12.1 | 18.32,29.07 v17.78,29.6 | 18.32,29.07 arc-29 18.15,29.7 v17.78,29.6 | 18.32,29.07 arc29 17.68,29.24 v17.78,29.6
  Top 0.406: 19.56,36.46 19.81,36.21 v20.07,36.21
  Bottom 0.203: v17.78,29.6 17.24,30.14 | 17.24,30.14 16,31.38 16,32.91 17.27,34.18 19.3,34.18 20.32,35.19 20.32,35.49 | v20.07,36.21 20.32,35.95 20.32,35.49 | 20.32,35.49 arc-29 20.46,36.12 v20.07,36.21 | 20.32,35.49 arc29 19.81,35.89 v20.07,36.21 | 17.24,30.14 arc-29 17.38,29.51 v17.78,29.6 | 17.24,30.14 arc29 17.87,30 v17.78,29.6
D14  (via drill 0.51 pad 1.02)
  Top 0.203: AVR1.2 18.99,37.22 18.03,37.22 | 18.03,37.22 v17.27,37.22 | v4.32,28.59 3.56,28.59 | 3.56,28.59 R8.1 | 18.03,37.22 arc-29 17.49,37.57 v17.27,37.22 | 18.03,37.22 arc29 17.49,36.88 v17.27,37.22 | 3.56,28.59 arc-29 4.1,28.24 v4.32,28.59 | 3.56,28.59 arc29 4.1,28.93 v4.32,28.59
  Bottom 0.203: 5.08,28.59 5.46,28.97 5.46,30.75 5.09,31.12 4.06,31.12 3.63,31.63 3.63,33.15 3.81,33.41 5.08,33.41 5.84,34.17 5.84,35.45 6.35,35.95 7.87,35.95 8.38,36.46 11.43,36.46 11.94,35.95 13.46,35.95 14.22,36.72 16.7,36.72 | 5.08,28.59 v4.32,28.59 | v17.27,37.22 16.76,36.72 16.7,36.72 | 16.7,36.72 arc-29 17.34,36.82 v17.27,37.22 | 16.7,36.72 arc29 16.88,37.34 v17.27,37.22 | 5.08,28.59 arc-29 4.54,28.93 v4.32,28.59 | 5.08,28.59 arc29 4.54,28.24 v4.32,28.59
D15
  Top 0.203: AVR1.9 17.53,44.84 | 17.53,44.84 17.53,45.35 | 17.53,44.84 arc-29 18.03,45.43 TP3.1 17.03,45.43 arc-29 17.53,44.84
  Top 0.406: 17.53,45.35 TP3.1
D16
  Top 0.203: AVR1.10 16.73,44.37 16.26,44.84 15.75,44.84 15.56,45.02 | 15.56,45.02 14.99,45.6 TP4.1 | 15.56,45.02 arc-29 15.64,45.79 TP4.1 | 15.56,45.02 arc29 14.81,45.22 TP4.1
D17  (via drill 0.51 pad 1.02)
  Top 0.203: AVR1.11 15.93,42.12 16.26,41.8 16.51,41.8 | 16.51,41.8 v17.27,41.8 | 16.51,41.8 arc-29 17.05,41.45 v17.27,41.8 | 16.51,41.8 arc29 17.05,42.14 v17.27,41.8
  Bottom 0.203: 16.62,42.19 15.24,43.57 14.22,43.57 12.86,44.93 | 16.62,42.19 17.02,41.8 v17.27,41.8 | 12.86,44.93 12.45,45.35 TP5.1 | 16.62,42.19 arc-29 16.91,41.62 v17.27,41.8 | 16.62,42.19 arc29 17.27,42.2 v17.27,41.8 | 12.86,44.93 arc-29 13.08,45.67 TP5.1 | 12.86,44.93 arc29 12.16,45.26 TP5.1
D18  (via drill 0.51 pad 1.02)
  Top 0.203: AVR1.14 13.53,42.49 | 13.53,42.49 13.53,42.12 v13.21,41.8 | 13.53,42.49 arc-29 12.99,42.14 v13.21,41.8 | 13.53,42.49 arc29 13.61,41.85 v13.21,41.8
  Bottom 0.203: v13.21,41.8 12.7,41.8 12.48,42.02 | 5.5,42.72 6.35,43.57 7.87,43.57 8.13,43.83 10.67,43.83 12.48,42.02 | 5.5,42.72 5.08,42.3 JP48.2 | 12.48,42.02 arc-29 12.9,41.53 v13.21,41.8 | 12.48,42.02 arc29 13.1,42.19 v13.21,41.8 | 5.5,42.72 arc-29 5.01,43.02 JP48.2 | 5.5,42.72 arc29 5.4,42.16 JP48.2
D19  (via drill 0.51 pad 1.02)
  Top 0.203: AVR2.13 39.33,18.95 | 39.33,18.95 39.33,18.7 v39.73,18.3 | 39.33,18.95 arc-29 39.33,18.3 v39.73,18.3 | 39.33,18.95 arc29 39.91,18.66 v39.73,18.3
  Bottom 0.203: JP74.1 27.54,18.8 27.96,18.39 | 27.96,18.39 28.81,17.53 33.13,17.53 33.89,18.3 36.68,18.3 37.7,17.28 38.72,17.28 39.19,17.76 | v39.73,18.3 39.19,17.76 | 39.19,17.76 arc-29 39.82,17.9 v39.73,18.3 | 39.19,17.76 arc29 39.34,18.39 v39.73,18.3 | 27.96,18.39 arc-29 27.86,18.95 JP74.1 | 27.96,18.39 arc29 27.47,18.09 JP74.1
D20
  Top 0.203: AVR2.12 40.13,20.69 39.73,21.09 35.67,21.09 35.32,21.43 | 35.32,21.43 34.91,21.85 TP14.1 | 35.32,21.43 arc-29 35.54,22.18 TP14.1 | 35.32,21.43 arc29 34.62,21.76 TP14.1
D21  (via drill 0.41, 0.51 pad 1.02)
  Top 0.203: AVR2.32 42.76,11.69 43.03,11.69 | 43.03,11.69 v43.8,11.69 | v30.84,9.14 30.59,9.4 30.29,9.4 | 30.29,9.4 27.79,9.4 27.03,8.64 | 43.03,11.69 arc-29 43.58,11.35 v43.8,11.69 | 43.03,11.69 arc29 43.58,12.04 v43.8,11.69 | 30.29,9.4 arc-29 30.65,8.98 v30.84,9.14 | 30.29,9.4 arc29 30.84,9.4 v30.84,9.14
  Bottom 0.203: 31.27,9.57 31.35,9.65 35.26,9.65 35.77,10.16 40.75,10.16 42.28,11.69 43.03,11.69 | 31.27,9.57 v30.84,9.14 | 43.03,11.69 v43.8,11.69 | 43.03,11.69 arc-29 43.58,11.35 v43.8,11.69 | 43.03,11.69 arc29 43.58,12.04 v43.8,11.69 | 31.27,9.57 arc-29 30.75,9.38 v30.84,9.14 | 31.27,9.57 arc29 31.08,9.06 v30.84,9.14
D22  (via drill 0.51 pad 1.02)
  Top 0.203: 43.54,12.96 AVR2.1 44.34,12.96 | 44.34,12.96 44.56,12.96 | 44.34,12.96 arc-29 44.75,12.45 v45.07,12.71 44.97,13.1 arc-29 44.34,12.96
  Top 0.254: 43.32,5.57 44.05,4.83 R18.1 | 43.32,5.57 v42.78,6.1 | 43.32,5.57 arc-29 43.15,6.2 v42.78,6.1 | 43.32,5.57 arc29 42.68,5.74 v42.78,6.1
  Top 0.406: 44.56,12.96 44.81,12.71 v45.07,12.71
  Bottom 0.203: v42.78,6.1 42.24,6.64 | 42.24,6.64 41,7.88 41,9.41 42.27,10.68 44.3,10.68 45.32,11.69 45.32,11.99 | v45.07,12.71 45.32,12.45 45.32,11.99 | 45.32,11.99 arc-29 45.46,12.62 v45.07,12.71 | 45.32,11.99 arc29 44.81,12.39 v45.07,12.71 | 42.24,6.64 arc-29 42.38,6.01 v42.78,6.1 | 42.24,6.64 arc29 42.87,6.5 v42.78,6.1
D23  (via drill 0.51 pad 1.02)
  Top 0.203: AVR2.2 43.99,13.72 43.03,13.72 | 43.03,13.72 v42.27,13.72 | v29.32,5.09 28.56,5.09 | 28.56,5.09 R14.1 | 43.03,13.72 arc-29 42.49,14.07 v42.27,13.72 | 43.03,13.72 arc29 42.49,13.38 v42.27,13.72 | 28.56,5.09 arc-29 29.1,4.74 v29.32,5.09 | 28.56,5.09 arc29 29.1,5.43 v29.32,5.09
  Bottom 0.203: 30.08,5.09 30.46,5.47 30.46,7.25 30.09,7.62 29.06,7.62 28.63,8.13 28.63,9.65 28.81,9.91 30.08,9.91 30.84,10.67 30.84,11.95 31.35,12.45 32.87,12.45 33.38,12.96 36.43,12.96 36.94,12.45 38.46,12.45 39.22,13.22 41.7,13.22 | 30.08,5.09 v29.32,5.09 | v42.27,13.72 41.76,13.22 41.7,13.22 | 41.7,13.22 arc-29 42.34,13.32 v42.27,13.72 | 41.7,13.22 arc29 41.88,13.84 v42.27,13.72 | 30.08,5.09 arc-29 29.54,5.43 v29.32,5.09 | 30.08,5.09 arc29 29.54,4.74 v29.32,5.09
D24
  Top 0.203: AVR2.9 42.53,21.34 | 42.53,21.34 42.53,21.85 | 42.53,21.34 arc-29 43.03,21.93 TP11.1 42.03,21.93 arc-29 42.53,21.34
  Top 0.406: 42.53,21.85 TP11.1
D25
  Top 0.203: AVR2.10 41.73,20.87 41.26,21.34 40.75,21.34 40.56,21.52 | 40.56,21.52 39.99,22.1 TP12.1 | 40.56,21.52 arc-29 40.64,22.29 TP12.1 | 40.56,21.52 arc29 39.81,21.72 TP12.1
D26  (via drill 0.51 pad 1.02)
  Top 0.203: AVR2.11 40.93,18.62 41.26,18.3 41.51,18.3 | 41.51,18.3 v42.27,18.3 | 41.51,18.3 arc-29 42.05,17.95 v42.27,18.3 | 41.51,18.3 arc29 42.05,18.64 v42.27,18.3
  Bottom 0.203: 41.62,18.69 40.24,20.07 39.22,20.07 37.86,21.43 | 41.62,18.69 42.02,18.3 v42.27,18.3 | 37.86,21.43 37.45,21.85 TP13.1 | 41.62,18.69 arc-29 41.91,18.11 v42.27,18.3 | 41.62,18.69 arc29 42.27,18.7 v42.27,18.3 | 37.86,21.43 arc-29 38.08,22.18 TP13.1 | 37.86,21.43 arc29 37.16,21.76 TP13.1
D27  (via drill 0.51 pad 1.02)
  Top 0.203: AVR2.14 38.53,18.99 | 38.53,18.99 38.53,18.62 v38.21,18.3 | 38.53,18.99 arc-29 37.99,18.64 v38.21,18.3 | 38.53,18.99 arc29 38.61,18.35 v38.21,18.3
  Bottom 0.203: v38.21,18.3 37.7,18.3 37.48,18.52 | 30.5,19.22 31.35,20.07 32.87,20.07 33.13,20.33 35.67,20.33 37.48,18.52 | 30.5,19.22 30.08,18.8 JP74.2 | 37.48,18.52 arc-29 37.9,18.03 v38.21,18.3 | 37.48,18.52 arc29 38.1,18.69 v38.21,18.3 | 30.5,19.22 arc-29 30.01,19.52 JP74.2 | 30.5,19.22 arc29 30.4,18.66 JP74.2
D28  (via drill 0.51 pad 1.02)
  Top 0.203: AVR3.13 39.33,42.45 | 39.33,42.45 39.33,42.2 v39.73,41.8 | 39.33,42.45 arc-29 39.33,41.8 v39.73,41.8 | 39.33,42.45 arc29 39.91,42.16 v39.73,41.8
  Bottom 0.203: JP100.1 27.54,42.3 27.96,41.89 | 27.96,41.89 28.81,41.03 33.13,41.03 33.89,41.8 36.68,41.8 37.7,40.78 38.72,40.78 39.19,41.26 | v39.73,41.8 39.19,41.26 | 39.19,41.26 arc-29 39.82,41.4 v39.73,41.8 | 39.19,41.26 arc29 39.34,41.89 v39.73,41.8 | 27.96,41.89 arc-29 27.86,42.45 JP100.1 | 27.96,41.89 arc29 27.47,41.59 JP100.1
D29
  Top 0.203: AVR3.12 40.13,44.19 39.73,44.59 35.67,44.59 35.32,44.93 | 35.32,44.93 34.91,45.35 TP19.1 | 35.32,44.93 arc-29 35.54,45.67 TP19.1 | 35.32,44.93 arc29 34.62,45.26 TP19.1
D30  (via drill 0.41, 0.51 pad 1.02)
  Top 0.203: AVR3.32 42.76,35.19 43.03,35.19 | 43.03,35.19 v43.8,35.19 | v30.84,32.64 30.59,32.9 30.29,32.9 | 30.29,32.9 27.79,32.9 27.03,32.14 | 43.03,35.19 arc-29 43.58,34.85 v43.8,35.19 | 43.03,35.19 arc29 43.58,35.54 v43.8,35.19 | 30.29,32.9 arc-29 30.65,32.48 v30.84,32.64 | 30.29,32.9 arc29 30.84,32.9 v30.84,32.64
  Bottom 0.203: 31.27,33.08 31.35,33.15 35.26,33.15 35.77,33.66 40.75,33.66 42.28,35.19 43.03,35.19 | 31.27,33.08 v30.84,32.64 | 43.03,35.19 v43.8,35.19 | 43.03,35.19 arc-29 43.58,34.85 v43.8,35.19 | 43.03,35.19 arc29 43.58,35.54 v43.8,35.19 | 31.27,33.08 arc-29 30.75,32.88 v30.84,32.64 | 31.27,33.08 arc29 31.08,32.56 v30.84,32.64
D31  (via drill 0.51 pad 1.02)
  Top 0.203: 43.54,36.46 AVR3.1 44.34,36.46 | 44.34,36.46 44.56,36.46 | 44.34,36.46 arc-29 44.75,35.95 v45.07,36.21 44.97,36.6 arc-29 44.34,36.46
  Top 0.254: 43.32,29.07 44.05,28.33 R24.1 | 43.32,29.07 v42.78,29.6 | 43.32,29.07 arc-29 43.15,29.7 v42.78,29.6 | 43.32,29.07 arc29 42.68,29.24 v42.78,29.6
  Top 0.406: 44.56,36.46 44.81,36.21 v45.07,36.21
  Bottom 0.203: v42.78,29.6 42.24,30.14 | 42.24,30.14 41,31.38 41,32.91 42.27,34.18 44.3,34.18 45.32,35.19 45.32,35.49 | v45.07,36.21 45.32,35.95 45.32,35.49 | 45.32,35.49 arc-29 45.46,36.12 v45.07,36.21 | 45.32,35.49 arc29 44.81,35.89 v45.07,36.21 | 42.24,30.14 arc-29 42.38,29.51 v42.78,29.6 | 42.24,30.14 arc29 42.87,30 v42.78,29.6
D32  (via drill 0.51 pad 1.02)
  Top 0.203: AVR3.2 43.99,37.22 43.03,37.22 | 43.03,37.22 v42.27,37.22 | v29.32,28.59 28.56,28.59 | 28.56,28.59 R20.1 | 43.03,37.22 arc-29 42.49,37.57 v42.27,37.22 | 43.03,37.22 arc29 42.49,36.88 v42.27,37.22 | 28.56,28.59 arc-29 29.1,28.24 v29.32,28.59 | 28.56,28.59 arc29 29.1,28.93 v29.32,28.59
  Bottom 0.203: 30.08,28.59 30.46,28.97 30.46,30.75 30.09,31.12 29.06,31.12 28.63,31.63 28.63,33.15 28.81,33.41 30.08,33.41 30.84,34.17 30.84,35.45 31.35,35.95 32.87,35.95 33.38,36.46 36.43,36.46 36.94,35.95 38.46,35.95 39.22,36.72 41.7,36.72 | 30.08,28.59 v29.32,28.59 | v42.27,37.22 41.76,36.72 41.7,36.72 | 41.7,36.72 arc-29 42.34,36.82 v42.27,37.22 | 41.7,36.72 arc29 41.88,37.34 v42.27,37.22 | 30.08,28.59 arc-29 29.54,28.93 v29.32,28.59 | 30.08,28.59 arc29 29.54,28.24 v29.32,28.59
D33
  Top 0.203: AVR3.9 42.53,44.84 | 42.53,44.84 42.53,45.35 | 42.53,44.84 arc-29 43.03,45.43 TP16.1 42.03,45.43 arc-29 42.53,44.84
  Top 0.406: 42.53,45.35 TP16.1
D34
  Top 0.203: AVR3.10 41.73,44.37 41.26,44.84 40.75,44.84 40.56,45.02 | 40.56,45.02 39.99,45.6 TP17.1 | 40.56,45.02 arc-29 40.64,45.79 TP17.1 | 40.56,45.02 arc29 39.81,45.22 TP17.1
D35  (via drill 0.51 pad 1.02)
  Top 0.203: AVR3.11 40.93,42.12 41.26,41.8 41.51,41.8 | 41.51,41.8 v42.27,41.8 | 41.51,41.8 arc-29 42.05,41.45 v42.27,41.8 | 41.51,41.8 arc29 42.05,42.14 v42.27,41.8
  Bottom 0.203: 41.62,42.19 40.24,43.57 39.22,43.57 37.86,44.93 | 41.62,42.19 42.02,41.8 v42.27,41.8 | 37.86,44.93 37.45,45.35 TP18.1 | 41.62,42.19 arc-29 41.91,41.62 v42.27,41.8 | 41.62,42.19 arc29 42.27,42.2 v42.27,41.8 | 37.86,44.93 arc-29 38.08,45.67 TP18.1 | 37.86,44.93 arc29 37.16,45.26 TP18.1
D36  (via drill 0.51 pad 1.02)
  Top 0.203: AVR3.14 38.53,42.49 | 38.53,42.49 38.53,42.12 v38.21,41.8 | 38.53,42.49 arc-29 37.99,42.14 v38.21,41.8 | 38.53,42.49 arc29 38.61,41.85 v38.21,41.8
  Bottom 0.203: v38.21,41.8 37.7,41.8 37.48,42.02 | 30.5,42.72 31.35,43.57 32.87,43.57 33.13,43.83 35.67,43.83 37.48,42.02 | 30.5,42.72 30.08,42.3 JP100.2 | 37.48,42.02 arc-29 37.9,41.53 v38.21,41.8 | 37.48,42.02 arc29 38.1,42.19 v38.21,41.8 | 30.5,42.72 arc-29 30.01,43.02 JP100.2 | 30.5,42.72 arc29 30.4,42.16 JP100.2
DTR
  Top 0.203: C2.2 21.98,8.13 | 21.98,8.13 22.49,8.64 JP10.1 | 21.98,8.13 arc-29 22.74,7.99 JP10.1 | 21.98,8.13 arc29 22.24,8.86 JP10.1
DTR1
  Top 0.203: C12.2 21.98,31.63 | 21.98,31.63 22.49,32.14 JP30.1 | 21.98,31.63 arc-29 22.74,31.49 JP30.1 | 21.98,31.63 arc29 22.24,32.36 JP30.1
DTR2
  Top 0.203: C19.2 46.98,8.13 | 46.98,8.13 47.49,8.64 JP56.1 | 46.98,8.13 arc-29 47.74,7.99 JP56.1 | 46.98,8.13 arc29 47.24,8.86 JP56.1
DTR3
  Top 0.203: C26.2 46.98,31.63 | 46.98,31.63 47.49,32.14 JP82.1 | 46.98,31.63 arc-29 47.74,31.49 JP82.1 | 46.98,31.63 arc29 47.24,32.36 JP82.1
GND  (via drill 0.51 pad 1.02)
  Top 0.203: AVR.5 18.18,16.16 17.78,15.76 17.78,14.99 18.22,14.56 AVR.3 | R3.1 16.93,4.67
  Top 0.254: v12.7,14.23 12.16,14.77 | 12.16,14.77 11.58,15.36 AVR.21 9.15,15.36 C1.1 | 12.16,14.77 arc-29 12.33,14.13 v12.7,14.23 | 12.16,14.77 arc29 12.8,14.6 v12.7,14.23